# Allegro board Route-1.brd
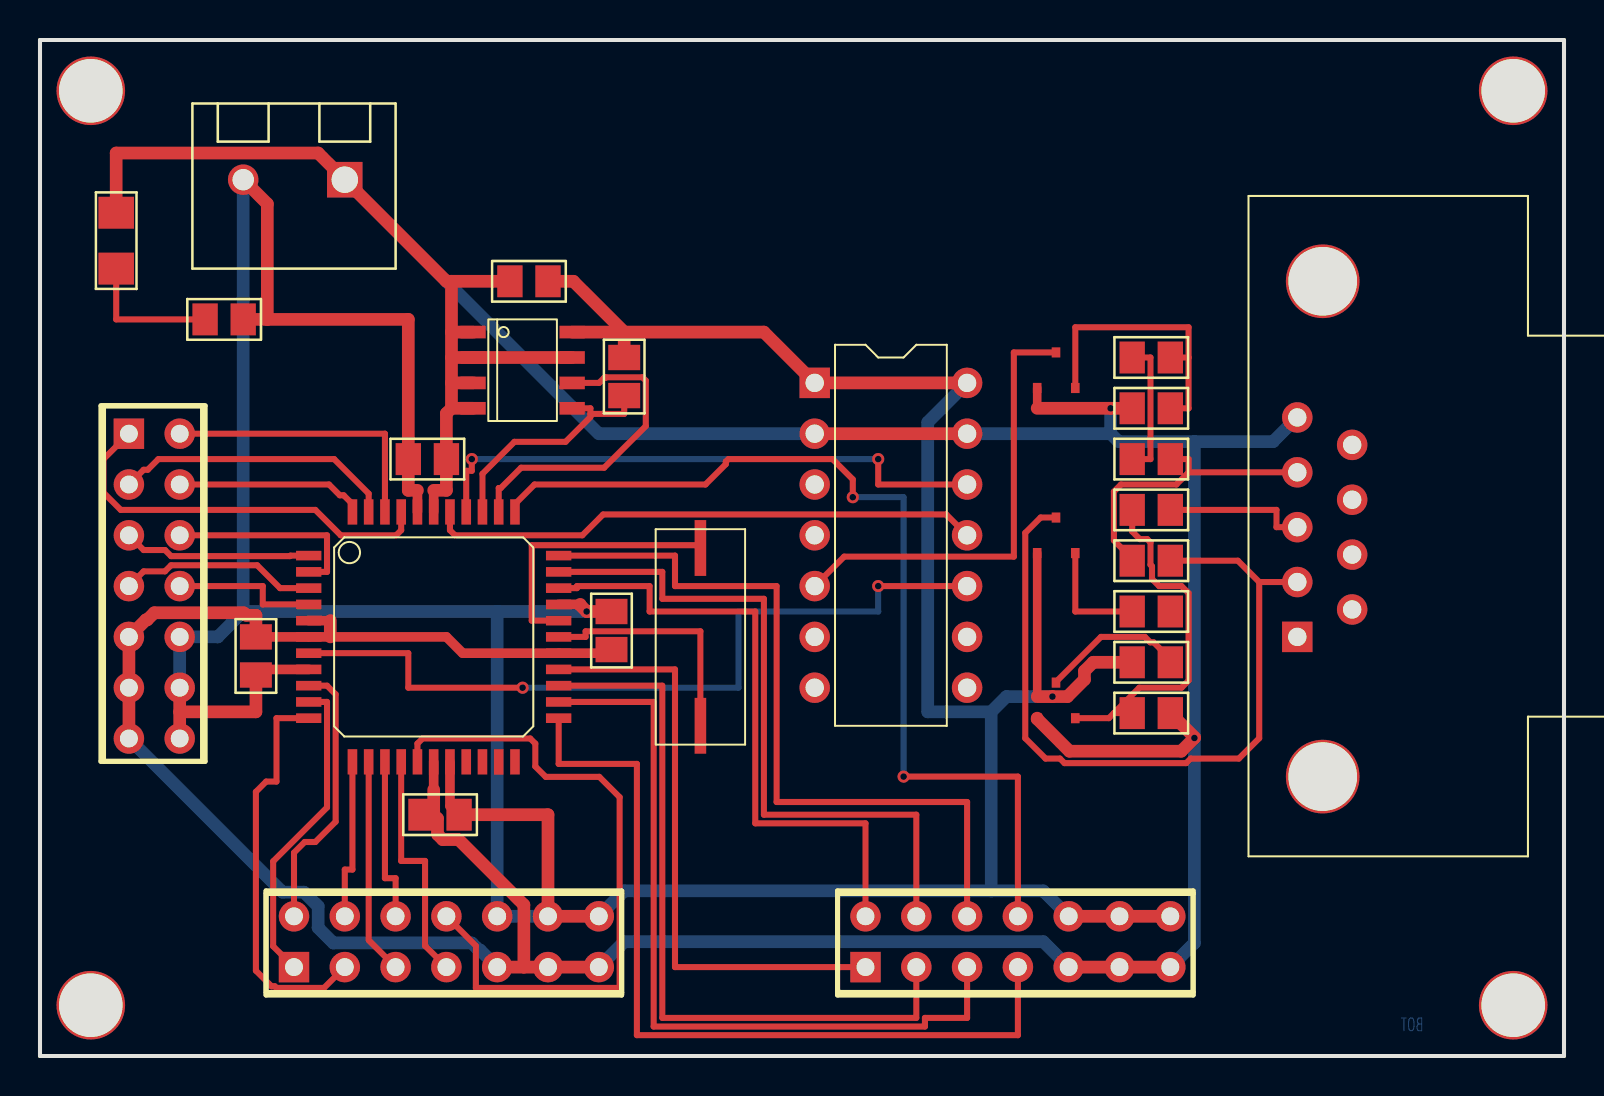
[diagram p0: board, top side]
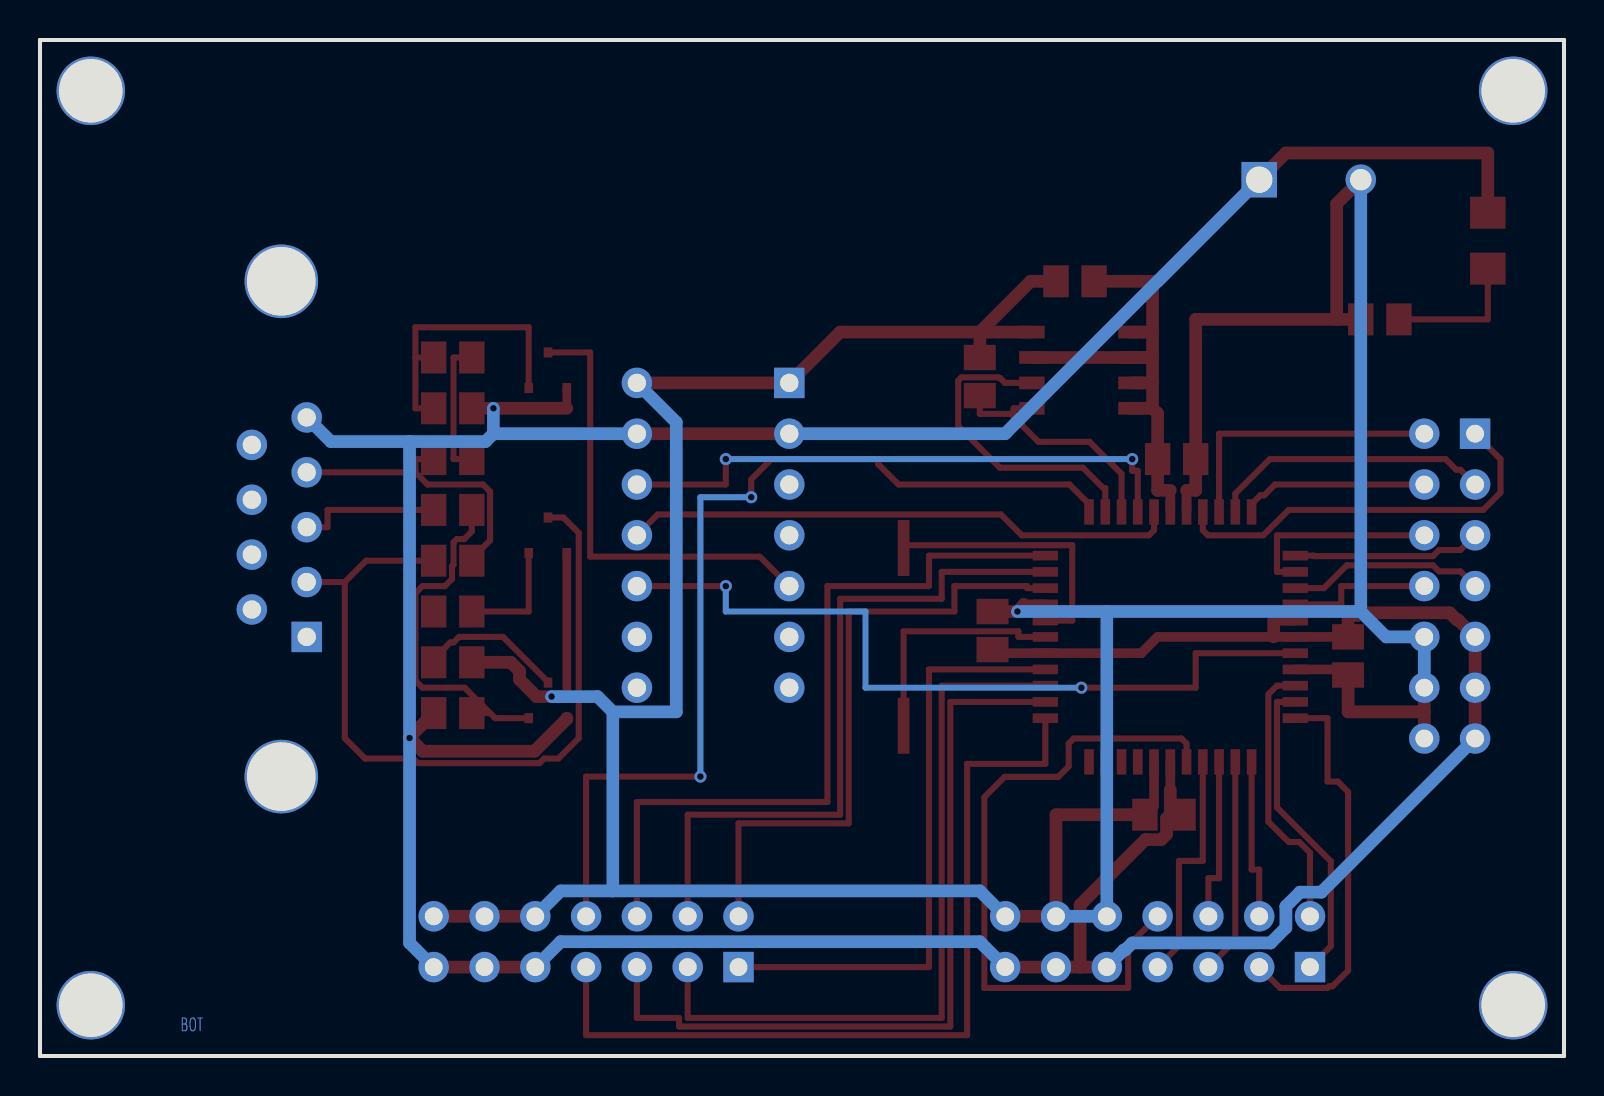
[diagram p1: board, bottom side, seen from below]

Outline 76.2 x 50.8 mm; copper layers: TOP, BOTTOM. Coordinates in mm from the lower left corner of the outline.

## Design rules (mm)
nets with their own width: min track width 0.305; nets N00317 N01659 N01662 N02322 N02325 N25718 N27959 N27974 N50194 N50248 N50252 N50256 N50302 N50360 N50422 P0 P1 P2 P3 P4 P5 P6 P7 P8 P9 P10 P11 P12 P13 P14 P15 P20 P21 P22 P23 P24 P25 P26 P27 P30 P31 RESN RX TX
nets with their own width: min track width 0.432; nets 3.3V GND

## Placement (name value [footprint] x y rotation side)
C1  0.1uF  [C_0805]  18.41 29.84 0 top
C2  0.1uF  [C_0805]  25.4 38.73 180 top
C3  0.1uF  [C_0805]  10.79 19.05 90 top
C4  0.1uF  [C_0805]  20.95 12.06 180 top
C5  0.1uF  [C_0805]  28.57 22.23 270 top
C6  0.01uF  [C_0805]  56.52 29.84 180 top
D1  Rouge  [D_1206]  3.81 39.37 90 top
J1  DIP-14  [DIP14_3]  38.73 33.66 0 top
J2  8-Entrees/Sorties  [HEADER_14]  41.27 4.45 0 top
J3  8-Entrees  [HEADER_14]  4.45 31.11 270 top
J4  8-Sorties  [HEADER_14]  12.7 4.45 0 top
JP1  3.3V  [CONNECTEUR_2_200]  15.24 43.81 180 top
NOREF  -  [unnamed]  0 0 0 top
P1  CONNECTOR DB9  [DB9]  62.87 20.95 270 top
Q1  2N3904  [SOT23]  50.8 34.29 90 top
Q2  2N3906  [SOT23]  50.8 26.04 90 top
Q3  2N3904  [SOT23]  50.8 17.78 90 top
R1  10K  [R_0805]  29.21 33.02 90 top
R2  220  [R_0805]  10.16 36.83 180 top
R3  10K  [R_0805]  54.61 34.92 0 top
R4  10K  [R_0805]  56.52 32.38 180 top
R5  10K  [R_0805]  54.61 24.77 0 top
R6  1k  [R_0805]  54.61 22.23 0 top
R7  4.7k  [R_0805]  54.61 19.68 0 top
R8  10K  [R_0805]  56.52 27.3 180 top
R9  10K  [R_0805]  54.61 17.14 0 top
U1  P8X32A-Q44  [PQFP44]  19.68 20.95 0 top
U2  24LC256  [SOIC8]  24.13 34.29 0 top
Y1  10.0MHz  [CRYSTAL_SMD]  33.02 20.95 90 top

## Library data of the parts
C1-C5 = C
C6 = CAP
D1 = LED_0
J1 = DIPSOC-7x2: Tolerance: ***; User Part Number: ***
J2-J4 = HEADER 7X2
JP1 = HEADER 2_0
P1 = CONNECTOR DB9: User Part Number: ***
Q1 Q3 = 2N3904
Q2 = 2N3906
R1-R9 = R
U1 = P8X32A-d40_15: Tolerance: ***; User Part Number: ***
U2 = 24LC256_1: Tolerance: ***; User Part Number: ***
Y1 = CRYSTAL

## Footprints (pads in the part's own frame, mm; a bottom-side part is the same pattern mirrored in y, then rotated)
C_0805
  rect 1.27x1.6 smd: 1(0,0) 2(1.905,0)
CONNECTEUR_2_200
  rect 1.778x1.778 hole 1.321: 1(0,0)
  round 1.524 hole 1.067: 2(5.08,0)
CRYSTAL_SMD
  rect 2.794x0.584 smd: 1(-4.445,0) 2(4.445,0)
D_1206
  rect 1.6x1.778 smd: 1(0,0) 2(2.794,0)
DB9
  round 3.683 hole 3.429 unplated: (-17.78,1.27) (6.985,1.27)
  rect 1.524x1.524 hole 0.914: 1(0,0)
  round 1.524 hole 0.914: 2(-2.743,0) 3(-5.486,0) 4(-8.23,0) 5(-10.973,0) 6(-1.372,2.743) 7(-4.115,2.743) 8(-6.858,2.743) 9(-9.601,2.743)
DIP14_3
  rect 1.524x1.524 hole 0.914: 1(0,0)
  round 1.524 hole 0.914: 2(0,-2.54) 3(0,-5.08) 4(0,-7.62) 5(0,-10.16) 6(0,-12.7) 7(0,-15.24) 8(7.62,-15.24) 9(7.62,-12.7) 10(7.62,-10.16) 11(7.62,-7.62) 12(7.62,-5.08) 13(7.62,-2.54) 14(7.62,0)
HEADER_14
  rect 1.524x1.524 hole 0.889: 1(0,0)
  round 1.524 hole 0.889: 2(0,2.54) 3(2.54,0) 4(2.54,2.54) 5(5.08,0) 6(5.08,2.54) 7(7.62,0) 8(7.62,2.54) 9(10.16,0) 10(10.16,2.54) 11(12.7,0) 12(12.7,2.54) 13(15.24,0) 14(15.24,2.54)
PQFP44
  rect 1.27x0.483 smd: 1(-6.248,4.064) 2(-6.248,3.251) 3(-6.248,2.438) 4(-6.248,1.626) 5(-6.248,0.813) 6(-6.248,0) 7(-6.248,-0.813) 8(-6.248,-1.626) 9(-6.248,-2.438) 10(-6.248,-3.251) 11(-6.248,-4.064) 23(6.248,-4.064) 24(6.248,-3.251) 25(6.248,-2.438) 26(6.248,-1.626) 27(6.248,-0.813) 28(6.248,0) 29(6.248,0.813) 30(6.248,1.626) 31(6.248,2.438) 32(6.248,3.251) 33(6.248,4.064)
  rect 0.483x1.27 smd: 12(-4.064,-6.248) 13(-3.251,-6.248) 14(-2.438,-6.248) 15(-1.626,-6.248) 16(-0.813,-6.248) 17(0,-6.248) 18(0.813,-6.248) 19(1.626,-6.248) 20(2.438,-6.248) 21(3.251,-6.248) 22(4.064,-6.248) 34(4.064,6.248) 35(3.251,6.248) 36(2.438,6.248) 37(1.626,6.248) 38(0.813,6.248) 39(0,6.248) 40(-0.813,6.248) 41(-1.626,6.248) 42(-2.438,6.248) 43(-3.251,6.248) 44(-4.064,6.248)
R_0805
  rect 1.27x1.6 smd: 1(0,0) 2(1.905,0)
SOIC8
  rect 1.27x0.635 smd: 1(-2.477,1.905) 2(-2.477,0.635) 3(-2.477,-0.635) 4(-2.477,-1.905) 5(2.477,-1.905) 6(2.477,-0.635) 7(2.477,0.635) 8(2.477,1.905)
SOT23
  rect 0.508x0.432 smd: 1(-0.889,0.94) 2(-0.889,-0.965) 3(0.889,0)
unnamed
  round 3.429 hole 3.175: (2.54,48.26) (2.54,2.54) (73.66,48.26) (73.66,2.54)

## Nets
3.3V: C1.1 C2.1 C3.1 C4.1 C5.1 J1.1 J1.14 J2.10 J2.12 J2.14 J3.10 J3.12 J3.14 J4.10 J4.12 J4.14 JP1.2 Q2.1(EMITTER) R1.2 R2.1 R7.1 U1.8 U1.18 U1.30 U1.40 U2.8(VCC)
GND: C1.2 C2.2 C3.2 C4.2 C5.2 D1.2 J1.2 J1.13 J2.9 J2.11 J2.13 J3.9 J3.11 J3.13 J4.9 J4.11 J4.13 JP1.1 P1.5 Q1.1(EMITTER) Q3.1(EMITTER) R4.2 R9.2 U1.5 U1.6(BOEN) U1.17 U1.27 U1.39 U2.1(A0) U2.2(A1) U2.3(A2) U2.4(VSS) U2.7(WP)
P0: J3.1 U1.41(P0)
P1: J3.2 U1.42(P1)
P2: J3.3 U1.43(P2)
P3: J3.4 U1.44(P3)
P4: J3.5 U1.1(P4)
P5: J3.6 U1.2(P5)
P6: J3.7 U1.3(P6)
P7: J3.8 U1.4(P7)
P8: J4.2 U1.9(P8)
P9: J4.1 U1.10(P9)
P10: J4.3 U1.11(P10)
P11: J4.4 U1.12(P11)
P12: J4.5 U1.13(P12)
P13: J4.6 U1.14(P13)
P14: J4.7 U1.15(P14)
P15: J4.8 U1.16(P15)
P20: J2.8 U1.34(P27)
P21: J2.6 U1.33(P26)
P22: J2.4 U1.32(P25)
P23: J2.2 U1.31(P24)
P24: J2.1 U1.26(P23)
P25: J2.3 U1.25(P22)
P26: J2.5 U1.24(P21)
P27: J2.7 U1.23(P20)
P30: J1.3
P31: J1.4
RESN: J1.5 Q1.3(COLLECTOR)
RX: Q3.3(COLLECTOR) R7.2
TX: R6.2
N00317: D1.1 R2.2
N01659: R1.1 U1.36(P29) U2.5(SDA)
N01662: U1.35(P28) U2.6(SCL)
N02322: U1.29(X0) Y1.2
N02325: U1.28(X1) Y1.1
N25718: J1.12 U1.37(P30)
N27959: J1.11 U1.38(P31)
N27974: J1.10 U1.7(RESN)
N50194: P1.2 Q2.3(COLLECTOR) R5.2
N50248: C6.1 P1.4 R5.1
N50252: C6.2 R3.1
N50256: Q1.2(BASE) R3.2 R4.1
N50302: Q3.2(BASE) R8.2 R9.1
N50360: P1.3 R8.1
N50422: Q2.2(BASE) R6.1

Pads without a net: J1 6 7 8 9; P1 1 6 7 8 9; U1 19 20 21 22

## Via types
v1: diameter 0.61, hole 0.33, TOP to BOTTOM, 10 vias

## Routing (per net, layer and track width the routed paths; a pad name or vN(x,y) marks a point on that pad's centre or on a via; arc(x,y) is an arc through that point)
3.3V: length 219.7
  TOP w0.432: 49.86,17.97 Q2.1
  TOP w0.483: 27.01,22.58 U1.30 ; 20.93,12.06 20.5,12.5 U1.18 ; 10.79,19.33 U1.8 ; U1.40 18.87,28.28
  TOP w0.635: 11.37,36.83 R2.1 ; 11.37,36.83 18.41,36.83 C1.1 18.41,28.28 18.87,28.28 ; 11.37,36.83 11.37,42.61 JP1.2 ; C2.1 26.67,38.73 29.21,36.2 ; 49.86,17.97 v1(50.62,17.97) 51.37,17.97 52.22,18.82 52.22,19.25 52.66,19.68 R7.1 ; 20.93,12.06 C4.1 25.4,12.06 J4.12 J4.14 ; 6.99,17.21 6.99,18.41 ; 6.99,17.21 10.79,17.21 C3.1 10.79,19.33 ; 6.99,17.21 6.99,15.88 ; 29.21,36.2 36.2,36.2 J1.1 J1.14 ; 29.21,36.2 U2.8 ; 29.21,36.2 29.21,34.92 ; J2.14 J2.10 ; C5.1 v1(27.33,22.23) 27.01,22.54 27.01,22.58
  BOTTOM w0.635: 22.86,22.23 J4.10 J4.12 ; 22.86,22.23 10.16,22.23 ; 22.86,22.23 v1(27.33,22.23) ; JP1.2 10.16,22.23 ; 10.16,22.23 8.89,20.95 6.99,20.95 6.99,18.41 ; J4.14 29.21,8.26 47.56,8.26 ; 47.56,17.21 48.32,17.97 v1(50.62,17.97) ; 47.56,17.21 44.39,17.21 44.39,31.69 J1.14 ; 47.56,17.21 47.56,8.26 ; 47.56,8.26 50.16,8.26 J2.10
GND: length 249.8
  TOP w0.432: 49.86,32.38 Q1.1
  TOP w0.483: U1.39 19.68,28.28 ; C3.2 U1.6 20.32,20.95 21.13,20.14 U1.27 28.57,20.14 ; 14.52,21.77 U1.5 ; 19.68,13.31 U1.17
  TOP w0.635: 19.68,12.06 19.88,11.87 19.88,11.08 20.14,10.82 20.93,10.82 24.19,7.56 24.19,4.45 ; 19.68,12.06 19.68,13.31 ; 19.68,12.06 C4.2 ; R9.2 57.72,15.94 v1(57.72,15.9) 57.06,15.24 51.47,15.24 49.86,16.85 Q3.1 ; C3.2 10.79,22.03 10.31,22.03 10.19,22.16 5.71,22.16 5.36,21.81 5.3,21.81 4.45,20.95 4.45,15.88 ; J2.13 J2.9 ; J4.13 J4.11 24.19,4.45 ; R4.2 v1(53.53,32.38) 49.86,32.38 ; J4.9 24.19,4.45 ; 20.57,36.2 U2.1 ; 20.57,36.2 20.57,34.92 ; 20.57,36.2 20.57,38.73 ; 20.57,33.66 U2.3 ; 20.57,33.66 20.57,34.92 ; 20.57,33.66 20.57,32.38 ; 20.57,34.92 U2.2 U2.7 ; J1.2 J1.13 ; D1.2 3.81,45.15 13.91,45.15 JP1.1 20.32,38.73 20.57,38.73 ; 23.5,38.73 20.57,38.73 ; 20.57,32.38 U2.4 ; 20.57,32.38 20.32,32.13 C1.2 20.32,28.28 19.68,28.28 ; 14.52,20.95 14.52,21.77 ; C5.2 28.57,20.14
  BOTTOM w0.635: J2.9 50.16,5.71 29.21,5.71 J4.13 ; 53.53,31.11 53.92,30.72 57.72,30.72 ; 53.53,31.11 J1.13 ; 53.53,31.11 v1(53.53,32.38) ; J1.2 27.94,31.11 JP1.1 ; 57.72,30.72 61.66,30.72 P1.5 ; 57.72,30.72 v1(57.72,15.9) 57.72,5.65 J2.13 ; 4.45,15.88 12.13,8.19 13.2,8.19 13.91,7.48 13.91,6.41 14.67,5.65 21.59,5.65 21.94,5.3 22.01,5.3 J4.9
P0: length 20.3
  TOP w0.305: J3.1 3.17,29.84 3.17,28.17 4.04,27.3 13.77,27.3 15.04,26.04 17.81,26.04 18.06,26.29 U1.41
P1: length 14.2
  TOP w0.305: J3.2 17.25,31.11 U1.42
P2: length 14.1
  TOP w0.305: U1.43 16.43,28.12 14.71,29.84 5.92,29.84 5.39,29.31 5.18,29.31 J3.3
P3: length 9.4
  TOP w0.305: U1.44 15.62,27.6 15.18,28.04 14.99,28.04 14.45,28.57 J3.4
P4: length 9.4
  TOP w0.305: 4.45,26.04 5.18,25.3 6.25,25.3 6.55,24.99 12.5,24.99 12.52,25.02 U1.1
P5: length 10.1
  TOP w0.305: 6.99,26.04 14.35,26.04 14.35,24.21 U1.2
P6: length 9.9
  TOP w0.305: 4.45,23.5 5.18,24.23 6.25,24.23 6.55,24.54 10.86,24.54 12,23.39 U1.3
P7: length 7.4
  TOP w0.305: 6.99,23.5 11.14,23.5 11.14,22.58 U1.4
P8: length 13.8
  TOP w0.305: J4.2 12.7,10.17 13.23,10.7 13.77,10.7 14.78,11.72 14.78,18.08 14.35,18.52 U1.9
P9: length 15.7
  TOP w0.305: J4.1 11.66,5.49 11.66,9.73 14.35,12.43 14.35,17.7 U1.10
P10: length 20.2
  TOP w0.305: U1.11 11.82,16.89 11.82,13.72 11.31,13.72 10.79,13.21 10.79,4.27 11.58,3.49 11.74,3.49 11.82,3.4 14.2,3.4 J4.3
P11: length 8.1
  TOP w0.305: J4.4 15.24,9.32 15.62,9.32 U1.12
P12: length 10.8
  TOP w0.305: J4.5 16.43,5.79 U1.13
P13: length 8.3
  TOP w0.305: J4.6 17.78,8.89 17.25,8.89 U1.14
P14: length 11.9
  TOP w0.305: U1.15 18.06,9.75 19.25,9.75 19.25,5.51 J4.7
P15: length 33.9
  TOP w0.305: U1.16 18.87,15.62 19.13,15.88 24.51,15.88 24.77,15.62 24.77,14.48 25.29,13.96 27.97,13.96 28.98,12.94 28.98,3.4 21.79,3.4 21.79,5.51 J4.8
P20: length 48.8
  TOP w0.305: v1(43.18,13.97) 48.9,13.97 48.9,6.99 ; U1.34 23.75,27.6 24.73,28.57 33.27,28.57 34.29,29.59 34.29,29.72 34.42,29.84 39.62,29.84 40.64,28.83 v1(40.64,27.94)
  BOTTOM w0.305: v1(43.18,13.97) 43.18,27.94 v1(40.64,27.94)
P21: length 38.5
  TOP w0.305: U1.33 31.75,25.02 31.75,23.5 36.83,23.5 36.83,12.7 46.35,12.7 J2.6
P22: length 35.1
  TOP w0.305: J2.4 43.81,12.06 36.2,12.06 36.2,22.86 31.11,22.86 31.11,24.21 U1.32
P23: length 32
  TOP w0.305: U1.31 26.85,23.39 26.85,23.5 30.48,23.5 30.48,22.23 35.76,22.23 35.76,11.63 41.27,11.63 J2.2
P24: length 30.2
  TOP w0.305: J2.1 31.75,4.45 31.75,19.33 U1.26
P25: length 37
  TOP w0.305: U1.25 31.11,18.52 31.11,1.91 43.81,1.91 J2.3
P26: length 39.6
  TOP w0.305: J2.5 46.35,1.91 44.25,1.91 44.25,1.47 30.68,1.47 30.68,17.7 U1.24
P27: length 42.2
  TOP w0.305: U1.23 25.93,14.61 29.84,14.61 29.84,1.04 48.9,1.04 48.9,4.45
RESN: length 22.9
  TOP w0.305: J1.5 40.21,24.97 48.69,24.97 48.69,35.18 Q1.3
RX: length 7.3
  TOP w0.305: Q3.3 50.8,18.71 53.05,20.95 55.24,20.95 55.52,20.68 55.68,20.68 56.52,19.85 R7.2
N00317: length 7
  TOP w0.305: D1.1 3.81,36.83 R2.2
N01659: length 12.4
  TOP w0.305: U2.5 27.52,32.38 27.52,32.11 ; 27.52,32.11 29.21,32.11 R1.1 ; 27.52,32.11 27.52,31.95 26.28,30.71 23.72,30.71 22.12,29.11 U1.36
N01662: length 16
  TOP w0.305: U2.6 27.95,33.66 28.2,33.9 28.26,33.9 28.29,33.93 30.13,33.93 30.29,33.77 30.29,31.5 28.21,29.41 24.05,29.41 23.04,28.4 22.94,28.4 U1.35
N02322: length 13.7
  TOP w0.305: Y1.2 33.02,25.54 24.59,25.54 24.59,21.77 U1.29
N02325: length 12.1
  TOP w0.305: U1.28 27.28,20.95 27.28,21.23 33.02,21.23 Y1.1
N25718: length 29
  TOP w0.305: v1(21.59,29.84) 21.59,29.26 21.31,29.26 U1.37 ; v1(41.91,29.84) 41.91,28.57 J1.12
  BOTTOM w0.305: v1(21.59,29.84) v1(41.91,29.84)
N27959: length 27.7
  TOP w0.305: U1.38 20.5,26.29 20.75,26.04 27.11,26.04 28.16,27.08 45.31,27.08 J1.11
N27974: length 39.7
  TOP w0.305: U1.7 18.41,20.14 18.41,18.41 v1(24.13,18.41) ; J1.10 v1(41.91,23.5)
  BOTTOM w0.305: v1(41.91,23.5) 41.91,22.23 34.92,22.23 34.92,18.41 v1(24.13,18.41)
N50194: length 39.5
  TOP w0.305: 60.96,23.7 59.89,24.77 R5.2 ; 60.96,23.7 P1.2 ; 60.96,23.7 60.96,15.89 59.94,14.87 57.54,14.87 57.31,14.64 51.23,14.64 51,14.87 50.28,14.87 49.26,15.89 49.26,26.16 50.03,26.92 Q2.3
N50248: length 15
  TOP w0.305: C6.1 57.43,29.84 57.43,29.18 ; 57.43,29.18 56.82,28.57 54.05,28.57 53.7,28.22 53.7,25.78 54.61,24.87 R5.1 ; 57.43,29.18 P1.4
N50252: length 6.9
  TOP w0.305: R3.1 55.52,34.92 55.52,29.84 C6.2
N50256: length 14.6
  TOP w0.305: R4.1 57.43,32.38 57.43,34.92 ; 57.43,34.92 R3.2 ; 57.43,34.92 57.43,36.44 51.77,36.44 Q1.2
N50302: length 17.9
  TOP w0.305: R9.1 53.7,17.14 ; 53.7,17.14 53.44,16.89 Q3.2 ; 53.7,17.14 54.97,18.41 57.08,18.41 57.43,18.77 57.43,23.14 57.08,23.5 55.95,23.5 55.6,23.85 55.6,24.49 55.52,24.56 55.52,25.68 55.36,25.84 54.99,25.84 54.61,26.23 R8.2
N50360: length 7.2
  TOP w0.305: P1.3 61.82,26.44 61.82,27.3 R8.1
N50422: length 5.8
  TOP w0.305: Q2.2 51.77,22.23 R6.1

## Text on the board
BOTTOM: BOT
